# Allegro board SMA_Prototype.brd
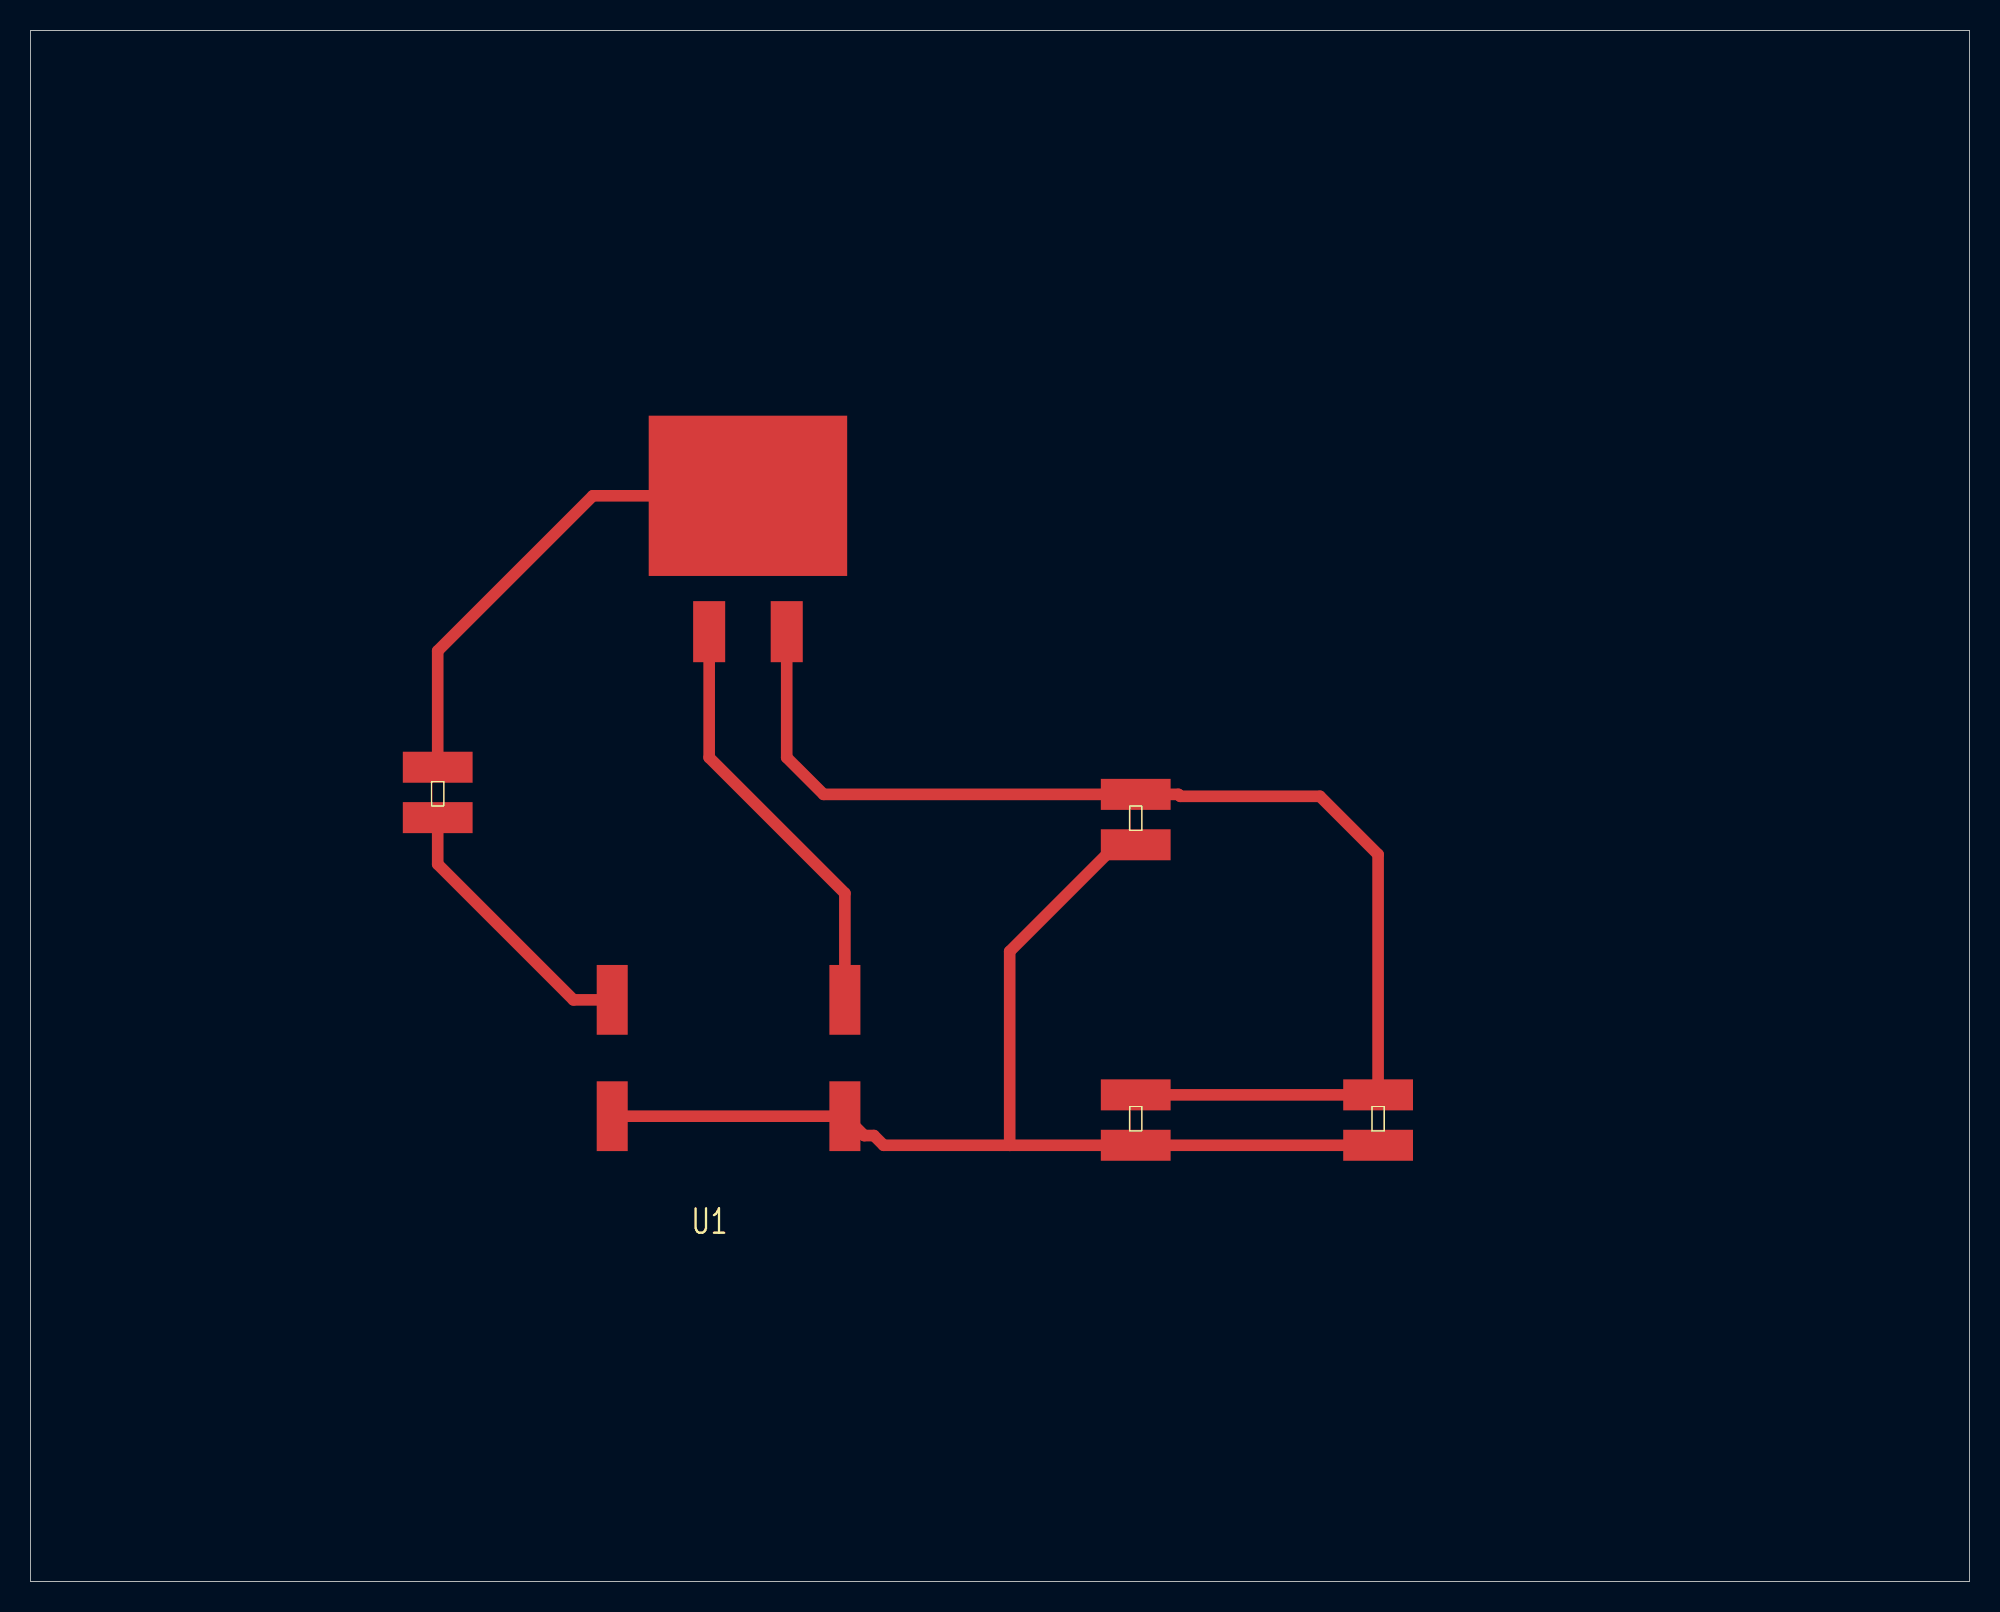
[diagram p0: board, top side]
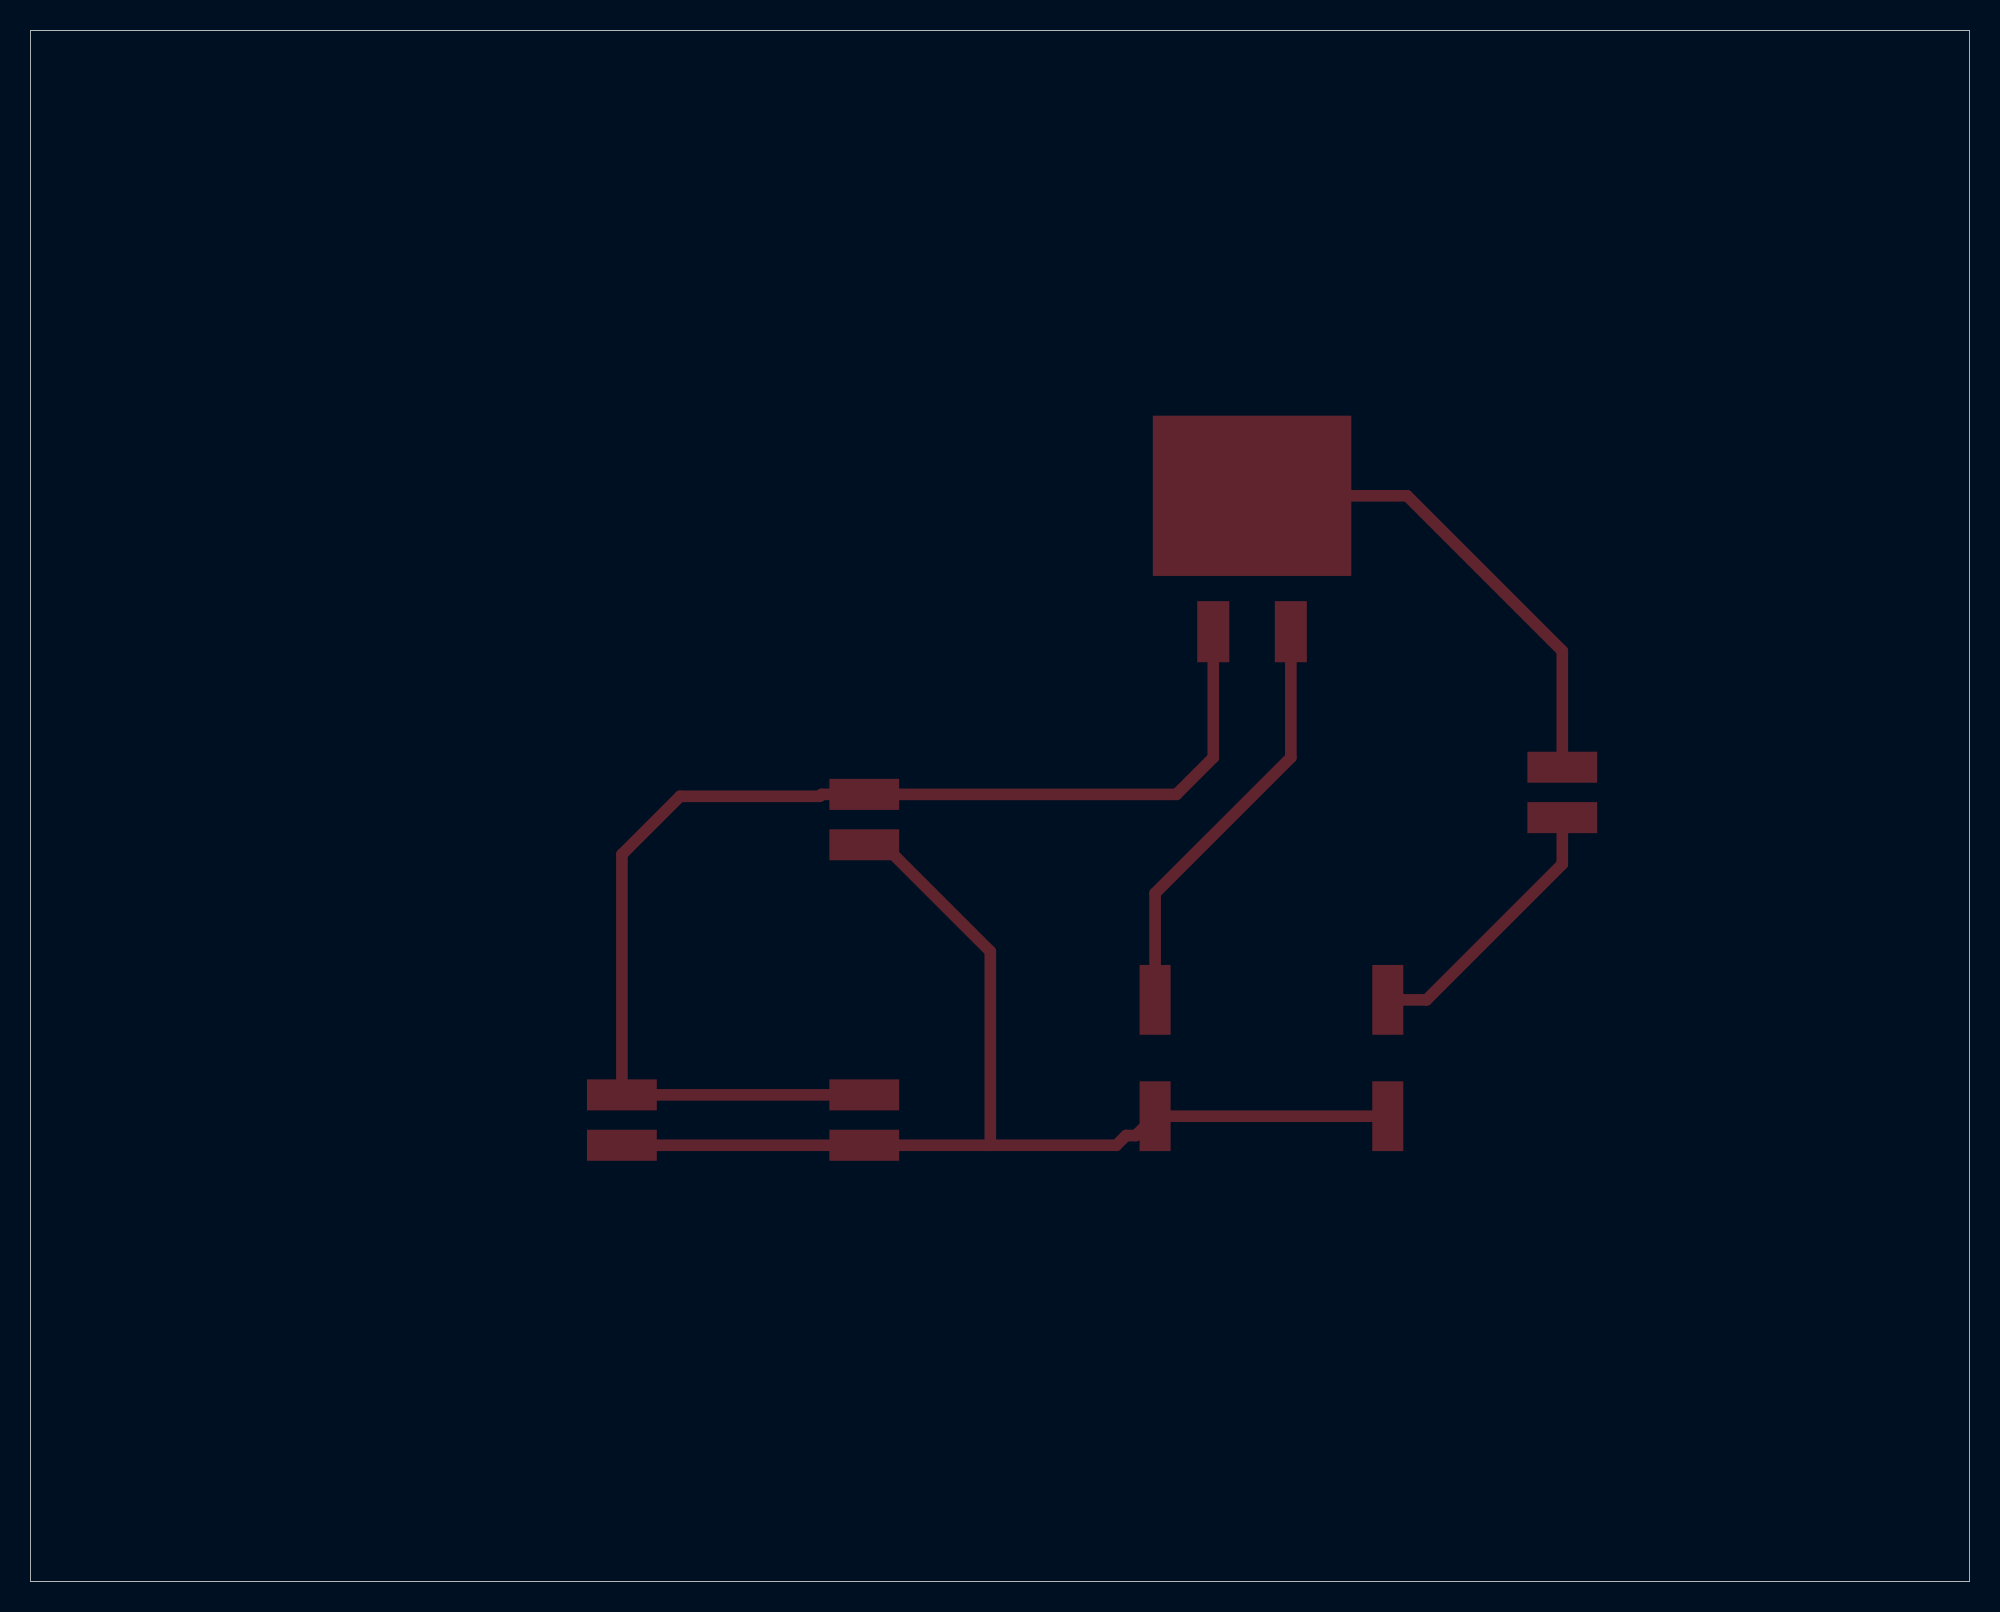
[diagram p1: board, bottom side, seen from below]

Outline 127 x 101.6 mm; copper layers: TOP, BOTTOM. Coordinates in mm from the lower left corner of the outline.
Outline path: 0,101.6 0,0 127,0 127,101.6 0,101.6

## Design rules (mm)
constraint set DEFAULT: min track width 0.127

## Placement (name value [footprint] x y rotation side)
C1  CAPACITOR  [LARGE_R_C]  72.39 31.11 270 top
C2  CAPACITOR  [LARGE_R_C]  88.27 31.11 270 top
Q1  MOSFET N  [STFW3N150]  46.99 71.12 0 top
R1  RESISTOR  [LARGE_R_C]  72.39 50.8 270 top
R2  RESISTOR  [LARGE_R_C]  26.67 50.8 90 top
U1  -  [B00JVJDEZE]  38.1 35.56 0 top

## Library data of the parts
C1 C2 = CAPACITOR
Q1 = MOSFET N
R1 R2 = RESISTOR
U1 = B00JVJDEZE

## Footprints (pads in the part's own frame, mm; a bottom-side part is the same pattern mirrored in y, then rotated)
B00JVJDEZE
  rect 2.032x4.572 smd: 1(15.24,2.54) 2(0,-5.08) 3(0,2.54) 4(15.24,-5.08)
LARGE_R_C
  rect 2.032x4.572 smd: 1(-0.762,0) 2(2.54,0)
STFW3N150
  rect 2.1x4 smd: 1(-2.54,-8.9) 3(2.54,-8.9)
  rect 13x10.5 smd: 2(0,0)

## Nets
GND: C1.2 C2.2 R1.2 U1.2 U1.4(VOUT-)
N00192: R2.1 U1.3
N00199: Q1.2 R2.2
N00239: C1.1 C2.1 Q1.3(SOURCE) R1.1
N00360: Q1.1 U1.1

## Routing (per net, layer and track width the routed paths; a pad name or vN(x,y) marks a point on that pad's centre or on a via; arc(x,y) is an arc through that point)
GND: length 74.8
  TOP w0.762: C2.2 C1.2 64.14,28.57 ; R1.2 71.12,48.26 64.14,41.27 64.14,28.57 ; 64.14,28.57 55.88,28.57 55.24,29.21 54.61,29.21 U1.4 U1.2
N00192: length 18.2
  TOP w0.762: R2.1 26.67,46.99 35.56,38.1 U1.3
N00199: length 32.1
  TOP w0.762: Q1.2 36.83,71.12 26.67,60.96 R2.2
N00239: length 81.2
  TOP w0.762: Q1.3 49.53,53.97 51.94,51.56 R1.1 75.18,51.56 75.31,51.43 84.45,51.43 88.27,47.62 C2.1 C1.1
N00360: length 27.8
  TOP w0.762: U1.1 53.34,45.08 44.45,53.97 Q1.1
